# Altium PCB SPI-主板-开关.PcbDoc (part 9 of 11)
Units mm, origin at the board's own origin, x right, y up, seen from the top; angles counter-clockwise.
Board outline 97.69 x 103.45 mm, 2 copper layers (Top Layer, Bottom Layer); 86 components, 63 nets, 260 pads, 250 vias.
Unrouted connection lines stored in the file: 6.
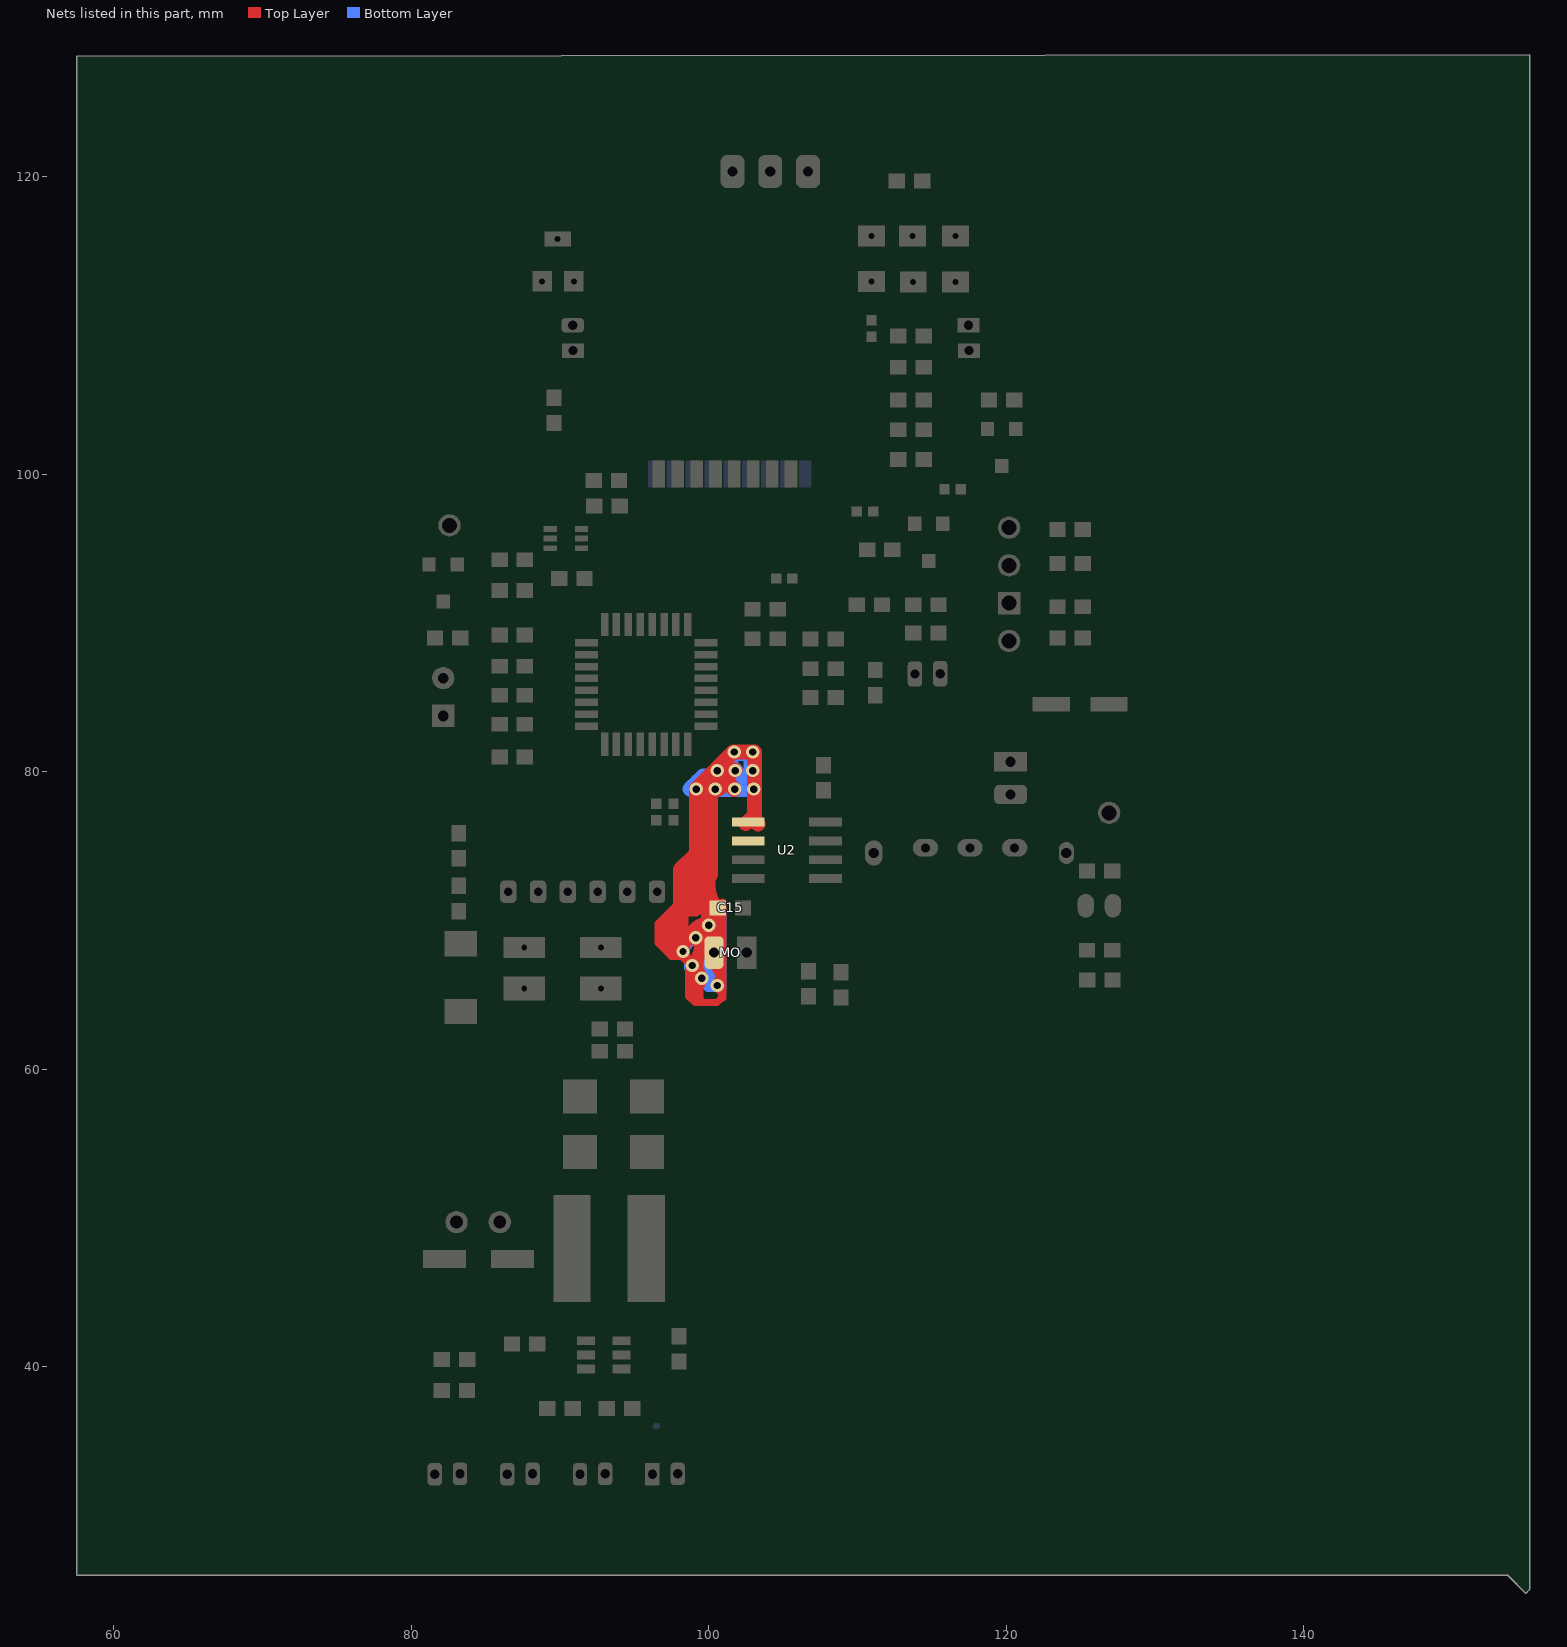
[diagram p9: the nets of this part, all layers, seen from the top]

## Via types
v1: diameter 0.9, hole 0.5, Top Layer to Bottom Layer, 104 vias
v2: diameter 0.68, hole 0.4, Top Layer to Bottom Layer, 100 vias
v3: diameter 1.1, hole 0.6, Top Layer to Bottom Layer, tented both sides, 16 vias
v4: diameter 1, hole 0.8, Top Layer to Bottom Layer, tented both sides, 8 vias
v5: diameter 1, hole 0.6, Top Layer to Bottom Layer, 4 vias
v6: diameter 0.8, hole 0.5, Top Layer to Bottom Layer, 4 vias
v7: diameter 0.7, hole 0.4, Top Layer to Bottom Layer, 4 vias
v8: diameter 0.6, hole 0.4, Top Layer to Bottom Layer, 3 vias
v9: diameter 1.1, hole 0.68, Top Layer to Bottom Layer, 2 vias
v10: diameter 0.8, hole 0.4, Top Layer to Bottom Layer, 2 vias
v11: diameter 1, hole 0.5, Top Layer to Bottom Layer, 1 vias
v12: diameter 0.9, hole 0.6, Top Layer to Bottom Layer, tented bottom, 1 vias
v13: diameter 1.2, hole 0.68, Top Layer to Bottom Layer, 1 vias

## Nets (pads, with @x,y where several pads share a name; then routed paths per layer and width w, separated by ;. In a path a pad name is that pad's centre, name@x,y a point inside that pad or via, vN(x,y) a via of type N, cw(c..) or ccw(c..) an arc to the next point about the centre after c; other vN are vias at no path point) (continued)
NetC4_1: C15.1 MO.2 U2.5 U2.6 | length 900.4
  Top Layer w0.254: 96.596,69.139 96.596,69.469 96.85,69.723 96.876,69.723 ; 97.231,70.202 97.231,69.698 ; 97.587,68.072 96.876,68.783 ; 97.762,68.336 ccw(c98.061,68.635) v1@98.181,68.229 ; 97.788,68.31 cw(c97.397,67.92) v1@97.95,67.92 ; 96.876,68.783 96.876,69.723 ; 96.876,68.783 96.774,68.885 96.596,68.885 96.596,68.809 97.447,67.958 ; 96.876,69.723 96.876,70.053 97.206,69.723 ; 96.876,69.723 97.206,69.723 ; 97.027,68.758 ccw(c98.273,70.004) v1@98.273,68.243 ; 97.027,68.758 ccw(c98.273,70.004) v1@98.273,68.243 ; 97.027,68.758 ccw(c98.273,70.004) v1@98.273,68.243 ; 97.079,69.367 96.952,69.367 97.231,69.647 ; 97.079,69.367 97.561,69.367 97.257,69.672 ; 97.079,69.367 96.977,69.266 96.977,68.809 97.828,67.958 97.447,67.958 ; 97.079,69.367 97.231,69.52 97.231,69.647 ; 97.206,69.723 97.231,69.698 ; 97.231,69.647 97.231,69.698 ; 97.231,69.647 97.257,69.672 ; 97.231,69.698 97.257,69.672 ; 97.447,67.958 cw(c97.447,67.157) v1@98.035,67.7 ; 97.447,67.958 cw(c97.447,67.157) v1@98.035,67.7 ; 97.447,67.958 cw(c97.447,67.157) v1@98.035,67.7 ; 97.461,68.325 ccw(c98.273,69.136) v1@98.273,67.989 ; 97.461,68.325 ccw(c98.273,69.136) v1@98.273,67.989 ; 97.461,68.325 ccw(c98.273,69.136) v1@98.273,67.989 ; 97.465,68.459 cw(c97.146,67.269) v1@98.213,67.885 ; 97.465,68.459 cw(c97.146,67.269) v1@98.213,67.885 ; 97.465,68.459 cw(c97.146,67.269) v1@98.213,67.885 ; 97.585,67.958 ccw(c97.585,68.607) v1@98.044,68.148 ; 97.585,67.958 ccw(c97.585,68.607) v1@98.044,68.148 ; 97.585,67.958 ccw(c97.585,68.607) v1@98.044,68.148 ; 97.587,68.172 cw(c97.445,67.64) v1@97.967,67.816 ; 97.587,68.172 cw(c97.445,67.64) v1@97.967,67.816 ; 97.587,68.172 cw(c97.445,67.64) v1@97.967,67.816 ; 97.692,68.144 ccw(c97.835,68.678) v1@98.111,68.199 ; 97.692,68.144 ccw(c97.835,68.678) v1@98.111,68.199 ; 97.692,68.144 ccw(c97.835,68.678) v1@98.111,68.199
  Top Layer w0.5: 97.184,69.295 97.561,69.672 97.565,69.676 ; 98.091,70.202 97.024,70.202 ; 98.095,70.206 98.4,70.51 ; 98.095,70.507 98.098,70.51 98.4,70.51 ; 98.095,71.272 97.024,70.202 ; v1@98.179,68.301 98.4,68.301 98.4,68.69 ; 98.437,67.405 cw(c98.246,66.985) v1@98.708,66.981 ; 98.574,67.469 ccw(c99.124,67.786) v1@98.959,67.173 ; v1@98.81,66.805 cw(c98.531,66.308) 99.101,66.308 ; v1@98.816,67.158 ccw(c98.578,67.623) 99.101,67.623 ; v1@98.825,66.709 cw(c98.339,65.778) v1@99.35,66.062 ; v1@98.856,66.787 cw(c98.654,66.032) v1@99.33,66.423 ; v1@98.881,66.782 cw(c98.782,66.048) v1@99.423,66.418 ; 98.989,66.53 cw(c98.794,66.008) v1@99.345,66.088 ; v1@99.096,66.913 ccw(c99.612,66.729) v1@99.241,66.326 ; v1@99.097,66.691 ccw(c99.806,67.101) v1@99.594,66.309 ; v1@99.105,67.009 ccw(c99.811,67.114) v1@99.495,66.474 ; v1@99.108,66.98 ccw(c99.83,66.98) v1@99.319,66.469 ; v1@99.107,66.988 ccw(c99.957,67.024) v1@99.382,66.398 ; v1@99.117,69.033 ccw(c99.032,69.935) v1@99.737,69.366 ; v1@99.119,66.64 ccw(c99.749,67.04) v1@99.586,66.311 ; v1@99.166,69.032 ccw(c99.255,69.619) 99.717,69.246 ; v1@99.192,66.662 cw(c98.795,66.264) v1@99.346,66.155 ; v1@99.247,66.722 cw(c98.898,66.373) v1@99.357,66.19 ; v1@99.309,68.935 cw(c100.368,68.323) v1@100.052,69.504 ; v1@99.32,68.912 cw(c99.591,69.027) 99.413,69.261 ; v1@99.335,68.815 cw(c100.292,68.723) v1@99.709,69.487 ; 99.375,69.232 ccw(c99.101,69.899) v1@99.805,69.741 ; 99.39,65.332 ccw(c97.26,65.332) v1@98.766,66.838 ; v1@99.41,68.961 ccw(c98.85,69.728) v1@99.8,69.703 ; 99.52,69.278 ccw(c99.964,68.834) v1@99.336,68.834 ; 99.601,69.226 cw(c99.136,69.691) v1@99.136,69.034 ; 99.807,69.026 cw(c100.377,69.026) v1@100.098,69.523 ; 99.974,71.323 99.162,70.51 ; v1@99.98,69.499 ccw(c99.929,68.995) 99.49,69.248 ccw(c99.864,68.874) v1@99.336,68.845 ; v1@100.182,69.781 cw(c100.453,69.906) 100.274,70.145 ; v1@100.187,69.769 cw(c100.622,69.934) 100.293,70.264 ; 100.202,70.151 ccw(c99.803,70.55) C15.1@100.328,70.758 ; 100.236,70.159 ccw(c99.521,70.572) 100.318,70.785 cw(c99.653,70.607) 100.25,70.262 ; C15.1@100.31,70.367 cw(c100.759,70.108) C15.1@100.625,70.609 ; C15.1@100.65,70.653 v1@99.974,69.977 ; C15.1@100.94,71.245 100.94,64.872 100.559,64.491 99.644,64.491 ; 97.024,70.202 96.596,69.774 96.596,68.504 97.485,67.615 ; 97.485,67.615 ccw(c97.485,68.281) v1@98.091,68.003 ; 97.485,67.615 ccw(c97.485,68.281) v1@98.091,68.003 ; 97.485,67.615 ccw(c97.485,68.281) v1@98.091,68.003 ; 97.485,67.615 98.171,67.615 v1@97.917,67.869 ; 97.739,67.869 ccw(c97.739,68.361) v1@98.119,68.047 ; 97.739,67.869 ccw(c97.739,68.361) v1@98.119,68.047 ; 97.739,67.869 ccw(c97.739,68.361) v1@98.119,68.047 ; 97.739,67.869 97.828,67.958 v1@97.917,67.869 ; 97.739,67.869 v1@97.917,67.869 ; v1@97.917,67.869 98.095,67.869 v1@98.146,67.818 ; v1@98.134,68.064 ccw(c97.53,68.69) 98.4,68.69 ; v1@98.134,68.064 ccw(c97.53,68.69) 98.4,68.69 ; v1@98.134,68.064 ccw(c97.53,68.69) 98.4,68.69 ; v1@98.146,67.818 97.968,67.818 v1@98.294,67.492 ; v1@98.146,67.818 98.222,67.818 98.882,67.158 v1@98.882,66.675 ; v1@98.146,67.818 98.294,67.67 v1@98.294,67.492 ; v1@98.221,67.726 cw(c98.103,67.287) 98.497,67.514 ; v1@98.221,67.726 cw(c98.103,67.287) 98.497,67.514 ; v1@98.221,67.726 cw(c98.103,67.287) 98.497,67.514 ; v1@98.221,67.726 cw(c98.103,67.287) 98.497,67.514 ; v1@98.221,67.726 cw(c98.103,67.287) 98.497,67.514 ; v1@98.221,67.726 cw(c98.103,67.287) 98.497,67.514 ; v1@98.294,67.492 v1@98.654,67.132 ; 98.393,67.393 ccw(c98.908,67.908) v1@98.908,67.18 ; 98.393,67.393 ccw(c98.908,67.908) v1@98.908,67.18 ; 98.393,67.393 ccw(c98.908,67.908) v1@98.908,67.18 ; 98.4,68.69 98.4,70.51 ; 98.4,70.51 99.162,70.51 ; v1@98.42,67.538 ccw(c99.061,67.908) v1@98.94,67.177 ; v1@98.42,67.538 ccw(c99.061,67.908) v1@98.94,67.177 ; v1@98.42,67.538 ccw(c99.061,67.908) v1@98.94,67.177 ; v1@98.458,67.581 cw(c97.857,66.98) v1@98.708,66.98 ; v1@98.458,67.581 cw(c97.857,66.98) v1@98.708,66.98 ; v1@98.458,67.581 cw(c97.857,66.98) v1@98.708,66.98 ; v1@98.465,67.864 ccw(c99.18,67.658) v1@98.654,67.132 ; v1@98.465,67.864 ccw(c99.18,67.658) v1@98.654,67.132 ; v1@98.465,67.864 ccw(c99.18,67.658) v1@98.654,67.132 ; v1@98.466,67.868 ccw(c98.959,67.736) 98.517,67.48 ; v1@98.466,67.868 ccw(c98.959,67.736) 98.517,67.48 ; v1@98.466,67.868 ccw(c98.959,67.736) 98.517,67.48 ; v1@98.466,67.868 ccw(c98.959,67.736) 98.517,67.48 ; v1@98.466,67.868 ccw(c98.959,67.736) 98.517,67.48 ; v1@98.466,67.868 ccw(c98.959,67.736) 98.517,67.48 ; v1@98.471,67.897 ccw(c99.233,67.808) v1@98.691,67.266 ; v1@98.471,67.897 ccw(c99.233,67.808) v1@98.691,67.266 ; v1@98.471,67.897 ccw(c99.233,67.808) v1@98.691,67.266 ; v1@98.471,67.897 ccw(c99.233,67.808) v1@98.691,67.266 ; v1@98.473,67.92 ccw(c99.323,67.92) v1@98.722,67.318 ; v1@98.473,67.92 ccw(c99.323,67.92) v1@98.722,67.318 ; v1@98.473,67.92 ccw(c99.323,67.92) v1@98.722,67.318 ; 98.654,65.884 cw(c100.004,65.884) v1@99.049,66.838 ; 98.654,65.884 cw(c100.004,65.884) v1@99.049,66.838 ; 98.654,65.884 cw(c100.004,65.884) v1@99.049,66.838 ; v1@98.654,66.904 v1@98.882,66.675 ; v1@98.654,66.904 98.654,64.922 99.085,64.491 99.644,64.491 ; v1@98.654,66.904 v1@98.654,67.132 ; 98.663,67.419 cw(c98.221,67.164) v1@98.714,67.032 ; 98.663,67.419 cw(c98.221,67.164) v1@98.714,67.032 ; 98.663,67.419 cw(c98.221,67.164) v1@98.714,67.032 ; 98.683,67.385 ccw(c99.077,67.612) v1@98.959,67.173 ; 98.683,67.385 ccw(c99.077,67.612) v1@98.959,67.173 ; 98.683,67.385 ccw(c99.077,67.612) v1@98.959,67.173 ; v1@98.71,66.927 ccw(c99.891,67.677) v1@99.586,66.311 ; v1@98.71,66.927 ccw(c99.891,67.677) v1@99.586,66.311 ; v1@98.71,66.927 ccw(c99.891,67.677) v1@99.586,66.311 ; v1@98.74,66.87 cw(c98.309,66.588) 98.755,66.33 ; v1@98.74,66.87 cw(c98.309,66.588) 98.755,66.33 ; v1@98.74,66.87 cw(c98.309,66.588) 98.755,66.33 ; v1@98.766,66.838 cw(c97.873,65.945) v1@99.136,65.945 ; v1@98.766,66.838 cw(c97.873,65.945) v1@99.136,65.945 ; v1@98.766,66.838 cw(c97.873,65.945) v1@99.136,65.945 ; v1@98.766,67.121 ccw(c97.26,68.628) v1@99.39,68.628 ; v1@98.766,67.121 ccw(c97.26,68.628) v1@99.39,68.628 ; v1@98.766,67.121 ccw(c97.26,68.628) v1@99.39,68.628 ; v1@98.842,66.791 cw(c98.697,66.376) 99.136,66.376 ; v1@98.842,66.791 cw(c98.697,66.376) 99.136,66.376 ; v1@98.842,66.791 cw(c98.697,66.376) 99.136,66.376 ; v1@98.868,66.784 cw(c98.66,65.739) v1@99.582,66.272 ; v1@98.868,66.784 cw(c98.66,65.739) v1@99.582,66.272 ; v1@98.868,66.784 cw(c98.66,65.739) v1@99.582,66.272 ; v1@98.868,66.784 cw(c98.66,65.739) v1@99.582,66.272 ; 98.882,65.661 cw(c99.65,65.661) v1@99.474,66.408 ; 98.882,65.661 cw(c99.65,65.661) v1@99.474,66.408 ; 98.882,65.661 cw(c99.65,65.661) v1@99.474,66.408 ; 98.882,66.436 cw(c99.452,66.436) v1@99.049,66.838 ; 98.882,66.436 cw(c99.452,66.436) v1@99.049,66.838 ; 98.882,66.436 cw(c99.452,66.436) v1@99.049,66.838 ; v1@98.882,66.675 99.136,66.421 ; v1@98.882,66.675 98.882,65.253 99.136,64.999 ; v1@98.937,66.782 cw(c99.006,66.305) v1@99.424,66.546 ; v1@98.937,66.782 cw(c99.006,66.305) v1@99.424,66.546 ; v1@98.937,66.782 cw(c99.006,66.305) v1@99.424,66.546 ; v1@98.937,66.782 cw(c99.006,66.305) v1@99.424,66.546 ; v1@98.982,66.689 ccw(c99.634,67.065) v1@99.562,66.315 ; v1@98.982,66.689 ccw(c99.634,67.065) v1@99.562,66.315 ; v1@98.982,66.689 ccw(c99.634,67.065) v1@99.562,66.315 ; v1@98.981,66.794 cw(c99.119,66.446) 99.442,66.633 ; v1@98.981,66.794 cw(c99.119,66.446) 99.442,66.633 ; v1@98.981,66.794 cw(c99.119,66.446) 99.442,66.633 ; v1@98.981,67.166 ccw(c99.119,67.513) 99.442,67.327 ; v1@98.981,67.166 ccw(c99.119,67.513) 99.442,67.327 ; v1@98.981,67.166 ccw(c99.119,67.513) 99.442,67.327 ; v1@98.995,68.693 cw(c98.04,67.738) 99.39,67.738 ; v1@98.995,68.693 cw(c98.04,67.738) 99.39,67.738 ; v1@98.995,68.693 cw(c98.04,67.738) 99.39,67.738 ; v1@99.02,68.671 cw(c98.691,68.209) 99.239,68.062 ; v1@99.02,68.671 cw(c98.691,68.209) 99.239,68.062 ; v1@99.02,68.671 cw(c98.691,68.209) 99.239,68.062 ; v1@99.02,68.671 cw(c98.691,68.209) 99.239,68.062 ; v1@99.02,68.671 cw(c98.691,68.209) 99.239,68.062 ; v1@99.02,68.671 cw(c98.691,68.209) 99.239,68.062 ; 99.028,66.529 ccw(c99.543,67.044) v1@99.543,66.316 ; 99.028,66.529 ccw(c99.543,67.044) v1@99.543,66.316 ; 99.028,66.529 ccw(c99.543,67.044) v1@99.543,66.316 ; v1@99.036,69.007 ccw(c98.427,70.062) v1@99.604,69.747 ; v1@99.036,69.007 ccw(c98.427,70.062) v1@99.604,69.747 ; v1@99.036,69.007 ccw(c98.427,70.062) v1@99.604,69.747 ; v1@99.036,69.007 ccw(c98.427,70.062) v1@99.604,69.747 ; v1@99.036,69.007 ccw(c98.427,70.062) v1@99.604,69.747 ; v1@99.036,69.007 ccw(c98.427,70.062) v1@99.604,69.747 ; 99.037,66.369 cw(c99.423,66.591) v1@99.067,66.859 ; 99.037,66.369 cw(c99.423,66.591) v1@99.067,66.859 ; 99.037,66.369 cw(c99.423,66.591) v1@99.067,66.859 ; 99.046,66.283 ccw(c99.699,66.458) v1@99.418,65.843 ; 99.046,66.283 ccw(c99.699,66.458) v1@99.418,65.843 ; 99.046,66.283 ccw(c99.699,66.458) v1@99.418,65.843 ; 99.058,65.636 ccw(c98.802,66.112) v1@99.343,66.115 ; 99.058,65.636 ccw(c98.802,66.112) v1@99.343,66.115 ; 99.058,65.636 ccw(c98.802,66.112) v1@99.343,66.115 ; 99.079,66.521 ccw(c99.446,66.733) v1@99.512,66.314 ; 99.079,66.521 ccw(c99.446,66.733) v1@99.512,66.314 ; 99.079,66.521 ccw(c99.446,66.733) v1@99.512,66.314 ; v1@99.079,66.877 ccw(c99.401,66.686) 99.136,66.421 ; v1@99.079,66.877 ccw(c99.401,66.686) 99.136,66.421 ; v1@99.079,66.877 ccw(c99.401,66.686) 99.136,66.421 ; v1@99.095,69.03 ccw(c99.019,69.393) 99.39,69.393 ; v1@99.095,69.03 ccw(c99.019,69.393) 99.39,69.393 ; v1@99.095,69.03 ccw(c99.019,69.393) 99.39,69.393 ; v1@99.101,67.032 cw(c100.204,67.327) 99.215,67.898 ; v1@99.101,67.032 cw(c100.204,67.327) 99.215,67.898 ; v1@99.101,67.032 cw(c100.204,67.327) 99.215,67.898 ; v1@99.102,66.932 ccw(c99.604,66.808) v1@99.254,66.427 ; v1@99.102,66.932 ccw(c99.604,66.808) v1@99.254,66.427 ; v1@99.102,66.932 ccw(c99.604,66.808) v1@99.254,66.427 ; v1@99.102,66.932 ccw(c99.604,66.808) v1@99.254,66.427 ; v1@99.103,66.938 ccw(c99.662,66.817) v1@99.258,66.413 ; v1@99.103,66.938 ccw(c99.662,66.817) v1@99.258,66.413 ; v1@99.103,66.938 ccw(c99.662,66.817) v1@99.258,66.413 ; v1@99.103,66.938 ccw(c99.662,66.817) v1@99.258,66.413 ; v1@99.115,69.033 ccw(c98.95,70.572) v1@100.266,69.757 ; v1@99.115,69.033 ccw(c98.95,70.572) v1@100.266,69.757 ; v1@99.115,69.033 ccw(c98.95,70.572) v1@100.266,69.757 ; v1@99.115,69.033 ccw(c98.95,70.572) v1@100.266,69.757 ; v1@99.115,69.033 ccw(c98.95,70.572) v1@100.266,69.757 ; v1@99.115,69.033 ccw(c98.95,70.572) v1@100.266,69.757 ; v1@99.12,66.768 ccw(c98.467,67.421) 99.39,67.421 ; v1@99.12,66.768 ccw(c98.467,67.421) 99.39,67.421 ; v1@99.12,66.768 ccw(c98.467,67.421) 99.39,67.421 ; v1@99.12,67.192 cw(c98.467,66.539) 99.39,66.539 ; v1@99.12,67.192 cw(c98.467,66.539) 99.39,66.539 ; v1@99.12,67.192 cw(c98.467,66.539) 99.39,66.539 ; 99.136,64.927 cw(c100.405,64.927) v1@99.66,65.954 ; 99.136,64.927 cw(c100.405,64.927) v1@99.66,65.954 ; 99.136,64.927 cw(c100.405,64.927) v1@99.66,65.954 ; 99.136,64.999 99.39,64.745 ; 99.136,64.999 99.136,66.421 ; 99.136,66.421 ccw(c99.42,66.705) v1@99.502,66.312 ; 99.136,66.421 ccw(c99.42,66.705) v1@99.502,66.312 ; 99.136,66.421 ccw(c99.42,66.705) v1@99.502,66.312 ; v1@99.136,69.034 ccw(c99.136,69.473) 99.447,69.163 ; v1@99.136,69.034 ccw(c99.136,69.473) 99.447,69.163 ; v1@99.136,69.034 ccw(c99.136,69.473) 99.447,69.163 ; v1@99.136,69.034 ccw(c99.136,69.473) 99.447,69.163 ; 99.162,70.51 cw(c99.873,69.799) C15.1@100.423,70.641 ; 99.162,70.51 cw(c99.873,69.799) C15.1@100.423,70.641 ; 99.162,70.51 cw(c99.873,69.799) C15.1@100.423,70.641 ; v1@99.168,68.536 ccw(c99.088,69.284) 99.727,68.888 ; v1@99.168,68.536 ccw(c99.088,69.284) 99.727,68.888 ; v1@99.168,68.536 ccw(c99.088,69.284) 99.727,68.888 ; v1@99.168,68.536 ccw(c99.088,69.284) 99.727,68.888 ; v1@99.168,68.536 ccw(c99.088,69.284) 99.727,68.888 ; v1@99.168,68.536 ccw(c99.088,69.284) 99.727,68.888 ; v1@99.182,69.017 cw(c100.015,68.536) v1@100.002,69.498 ; v1@99.182,69.017 cw(c100.015,68.536) v1@100.002,69.498 ; v1@99.182,69.017 cw(c100.015,68.536) v1@100.002,69.498 ; v1@99.182,69.017 cw(c100.015,68.536) v1@100.002,69.498 ; 99.272,65.476 ccw(c98.834,65.831) v1@99.357,66.042 ; 99.272,65.476 ccw(c98.834,65.831) v1@99.357,66.042 ; 99.272,65.476 ccw(c98.834,65.831) v1@99.357,66.042 ; 99.288,68.184 cw(c99.735,68.442) v1@99.304,68.724 ; 99.288,68.184 cw(c99.735,68.442) v1@99.304,68.724 ; 99.288,68.184 cw(c99.735,68.442) v1@99.304,68.724 ; v1@99.301,69.017 cw(c100.15,68.527) v1@100.025,69.499 ; v1@99.301,69.017 cw(c100.15,68.527) v1@100.025,69.499 ; v1@99.301,69.017 cw(c100.15,68.527) v1@100.025,69.499 ; v1@99.315,68.924 cw(c99.677,69.106) 99.39,69.393 ; v1@99.315,68.924 cw(c99.677,69.106) 99.39,69.393 ; v1@99.315,68.924 cw(c99.677,69.106) 99.39,69.393 ; v1@99.319,68.753 cw(c100.364,68.291) v1@99.952,69.356 ; v1@99.319,68.753 cw(c100.364,68.291) v1@99.952,69.356 ; v1@99.319,68.753 cw(c100.364,68.291) v1@99.952,69.356 ; v1@99.319,68.753 cw(c100.364,68.291) v1@99.952,69.356 ; v1@99.329,68.885 cw(c99.898,69.037) 99.482,69.453 ; v1@99.329,68.885 cw(c99.898,69.037) 99.482,69.453 ; v1@99.329,68.885 cw(c99.898,69.037) 99.482,69.453 ; v1@99.329,68.885 cw(c99.898,69.037) 99.482,69.453 ; v1@99.336,68.834 cw(c100.555,68.834) v1@99.693,69.696 ; v1@99.336,68.834 cw(c100.555,68.834) v1@99.693,69.696 ; v1@99.336,68.834 cw(c100.075,68.834) 99.553,69.356 ; v1@99.336,68.834 cw(c99.862,68.834) 99.49,69.206 ; v1@99.336,68.834 cw(c100.555,68.834) v1@99.693,69.696 ; v1@99.336,68.834 cw(c100.075,68.834) 99.553,69.356 ; v1@99.336,68.834 cw(c99.862,68.834) 99.49,69.206 ; v1@99.336,68.834 cw(c100.075,68.834) 99.553,69.356 ; v1@99.336,68.834 cw(c99.862,68.834) 99.49,69.206 ; v1@99.336,68.834 cw(c100.075,68.834) 99.553,69.356 ; v1@99.336,68.834 cw(c99.862,68.834) 99.49,69.206 ; v1@99.336,68.846 cw(c100.016,68.887) 99.534,69.369 ; v1@99.336,68.846 cw(c100.016,68.887) 99.534,69.369 ; v1@99.336,68.846 cw(c100.016,68.887) 99.534,69.369 ; v1@99.336,68.846 cw(c100.016,68.887) 99.534,69.369 ; v1@99.336,68.846 cw(c100.016,68.887) 99.534,69.369 ; v1@99.353,69.157 cw(c99.946,68.814) v1@99.988,69.498 ; v1@99.353,69.157 cw(c99.946,68.814) v1@99.988,69.498 ; v1@99.353,69.157 cw(c99.946,68.814) v1@99.988,69.498 ; 99.358,66.661 ccw(c99.949,66.819) v1@99.643,66.289 ; 99.358,66.661 ccw(c99.949,66.819) v1@99.643,66.289 ; 99.358,66.661 ccw(c99.949,66.819) v1@99.643,66.289 ; 99.39,64.745 99.644,64.491 ; 99.39,64.745 99.39,69.393 ; 99.39,65.265 cw(c100.393,65.265) v1@99.684,65.975 ; 99.39,65.265 cw(c100.393,65.265) v1@99.684,65.975 ; 99.39,65.265 cw(c100.393,65.265) v1@99.684,65.975 ; 99.39,66.967 ccw(c100.393,66.967) v1@99.684,66.258 ; 99.39,66.967 ccw(c100.393,66.967) v1@99.684,66.258 ; 99.39,66.967 ccw(c100.393,66.967) v1@99.684,66.258 ; 99.39,67.743 cw(c101.954,67.743) v1@100.141,69.556 ; 99.39,67.743 cw(c101.954,67.743) v1@100.141,69.556 ; 99.39,67.743 cw(c101.954,67.743) v1@100.141,69.556 ; v1@99.39,68.95 cw(c100.747,68.95) v1@99.788,69.91 ; v1@99.39,68.95 cw(c100.747,68.95) v1@99.788,69.91 ; v1@99.39,68.95 cw(c100.747,68.95) v1@99.788,69.91 ; 99.39,69.393 cw(c99.751,69.032) v1@99.93,69.51 ; 99.39,69.393 cw(c99.751,69.032) v1@99.93,69.51 ; 99.39,69.393 cw(c99.751,69.032) v1@99.93,69.51 ; 99.39,69.393 v1@99.974,69.977 ; v1@99.417,65.961 cw(c99.251,65.754) 99.48,65.622 ; v1@99.417,65.961 cw(c99.251,65.754) 99.48,65.622 ; v1@99.417,65.961 cw(c99.251,65.754) 99.48,65.622 ; v1@99.417,66.272 ccw(c99.251,66.478) 99.48,66.611 ; v1@99.417,66.272 ccw(c99.251,66.478) 99.48,66.611 ; v1@99.417,66.272 ccw(c99.251,66.478) 99.48,66.611 ; 99.597,70.946 cw(c100.217,70.325) C15.1@100.697,71.059 ; 99.597,70.946 cw(c100.217,70.325) C15.1@100.697,71.059 ; 99.597,70.946 cw(c100.217,70.325) C15.1@100.697,71.059 ; 99.676,69.202 ccw(c99.362,69.536) v1@99.806,69.648 ; 99.676,69.202 ccw(c99.362,69.536) v1@99.806,69.648 ; 99.676,69.202 ccw(c99.362,69.536) v1@99.806,69.648 ; 99.676,69.202 ccw(c99.362,69.536) v1@99.806,69.648 ; 99.692,68.779 ccw(c98.703,69.35) v1@99.807,69.646 ; 99.692,68.779 ccw(c98.703,69.35) v1@99.807,69.646 ; 99.692,68.779 ccw(c98.703,69.35) v1@99.807,69.646 ; v1@99.9,69.871 ccw(c99.363,70.8) C15.1@100.4,70.523 ; v1@99.9,69.871 ccw(c99.363,70.8) C15.1@100.4,70.523 ; v1@99.9,69.871 ccw(c99.363,70.8) C15.1@100.4,70.523 ; v1@99.9,69.871 ccw(c99.363,70.8) C15.1@100.4,70.523 ; v1@99.925,69.883 ccw(c99.652,70.563) C15.1@100.36,70.374 ; v1@99.925,69.883 ccw(c99.652,70.563) C15.1@100.36,70.374 ; v1@99.925,69.883 ccw(c99.652,70.563) C15.1@100.36,70.374 ; v1@99.925,69.883 ccw(c99.652,70.563) C15.1@100.36,70.374 ; v1@99.948,69.891 ccw(c99.829,70.336) 100.228,70.106 ; v1@99.948,69.891 ccw(c99.829,70.336) 100.228,70.106 ; v1@99.948,69.891 ccw(c99.829,70.336) 100.228,70.106 ; v1@99.948,69.891 ccw(c99.829,70.336) 100.228,70.106 ; v1@99.948,69.891 ccw(c99.829,70.336) 100.228,70.106 ; v1@99.974,69.977 ccw(c99.161,70.79) C15.1@100.31,70.839 ; v1@99.974,69.977 ccw(c99.161,70.79) C15.1@100.31,70.839 ; v1@99.974,69.977 ccw(c99.161,70.79) C15.1@100.31,70.839 ; v1@100.07,69.832 cw(c101.345,69.491) C15.1@100.685,70.634 ; v1@100.07,69.832 cw(c101.345,69.491) C15.1@100.685,70.634 ; v1@100.07,69.832 cw(c101.345,69.491) C15.1@100.685,70.634 ; v1@100.07,69.832 cw(c101.345,69.491) C15.1@100.685,70.634 ; MO.2@100.175,67.108 cw(c98.33,65.262) 100.94,65.262 ; MO.2@100.175,67.108 cw(c98.33,65.262) 100.94,65.262 ; MO.2@100.175,67.108 cw(c98.33,65.262) 100.94,65.262 ; MO.2@100.175,68.573 ccw(c98.33,70.419) C15.1@100.94,70.419 ; MO.2@100.175,68.573 ccw(c98.33,70.419) C15.1@100.94,70.419 ; MO.2@100.175,68.573 ccw(c98.33,70.419) C15.1@100.94,70.419 ; v1@100.184,69.775 cw(c100.849,70.052) C15.1@100.225,70.412 ; v1@100.184,69.775 cw(c100.849,70.052) C15.1@100.225,70.412 ; v1@100.184,69.775 cw(c100.849,70.052) C15.1@100.225,70.412 ; v1@100.184,69.775 cw(c100.849,70.052) C15.1@100.225,70.412 ; v1@100.184,69.775 cw(c100.849,70.052) C15.1@100.225,70.412 ; v1@100.184,69.775 cw(c100.849,70.052) C15.1@100.225,70.412 ; v1@100.193,69.749 cw(c100.681,69.88) 100.243,70.132 ; v1@100.193,69.749 cw(c100.681,69.88) 100.243,70.132 ; v1@100.193,69.749 cw(c100.681,69.88) 100.243,70.132 ; v1@100.193,69.749 cw(c100.681,69.88) 100.243,70.132 ; v1@100.193,69.749 cw(c100.681,69.88) 100.243,70.132 ; v1@100.2,69.698 cw(c101.418,69.698) C15.1@100.557,70.559 ; v1@100.2,69.698 cw(c101.418,69.698) C15.1@100.557,70.559 ; v1@100.2,69.698 cw(c101.418,69.698) C15.1@100.557,70.559 ; 100.283,70.084 ccw(c99.62,70.467) C15.1@100.328,70.756 ; 100.283,70.084 ccw(c99.62,70.467) C15.1@100.328,70.756 ; 100.283,70.084 ccw(c99.62,70.467) C15.1@100.328,70.756 ; v1@100.443,65.775 ccw(c99.243,66.975) MO.2@100.94,66.975 ; v1@100.443,65.775 ccw(c99.243,66.975) MO.2@100.94,66.975 ; v1@100.443,65.775 ccw(c99.243,66.975) MO.2@100.94,66.975 ; C15.1@100.473,70.641 cw(c100.072,70.024) 100.783,69.833 ; C15.1@100.473,70.641 cw(c100.072,70.024) 100.783,69.833 ; C15.1@100.473,70.641 cw(c100.072,70.024) 100.783,69.833 ; C15.1@100.483,70.673 cw(c99.381,69.571) 100.94,69.571 ; C15.1@100.483,70.673 cw(c99.381,69.571) 100.94,69.571 ; C15.1@100.483,70.673 cw(c99.381,69.571) 100.94,69.571 ; v1@100.506,65.45 cw(c100.226,64.793) 100.94,64.793 ; v1@100.506,65.45 cw(c100.226,64.793) 100.94,64.793 ; v1@100.506,65.45 cw(c100.226,64.793) 100.94,64.793 ; v1@100.522,65.824 ccw(c100.438,66.083) 100.701,66.153 ; v1@100.522,65.824 ccw(c100.438,66.083) 100.701,66.153 ; v1@100.522,65.824 ccw(c100.438,66.083) 100.701,66.153 ; v1@100.522,65.824 ccw(c100.438,66.083) 100.701,66.153 ; v1@100.522,65.824 ccw(c100.438,66.083) 100.701,66.153 ; v1@100.522,65.824 ccw(c100.438,66.083) 100.701,66.153 ; MO.2@100.529,67.461 cw(c99.537,66.469) 100.94,66.469 ; MO.2@100.529,67.461 cw(c99.537,66.469) 100.94,66.469 ; MO.2@100.529,67.461 cw(c99.537,66.469) 100.94,66.469 ; MO.2@100.529,68.22 ccw(c99.537,69.212) 100.94,69.212 ; MO.2@100.529,68.22 ccw(c99.537,69.212) 100.94,69.212 ; MO.2@100.529,68.22 ccw(c99.537,69.212) 100.94,69.212 ; 100.739,66.131 cw(c101.568,66.609) MO.2@100.785,67.16 ; 100.739,66.131 cw(c101.568,66.609) MO.2@100.785,67.16 ; 100.739,66.131 cw(c101.568,66.609) MO.2@100.785,67.16 ; 100.739,69.55 ccw(c101.568,69.071) MO.2@100.785,68.521 ; 100.739,69.55 ccw(c101.568,69.071) MO.2@100.785,68.521 ; 100.739,69.55 ccw(c101.568,69.071) MO.2@100.785,68.521 ; v1@100.77,65.706 cw(c101.561,66.015) 100.826,66.439 ; v1@100.77,65.706 cw(c101.561,66.015) 100.826,66.439 ; v1@100.77,65.706 cw(c101.561,66.015) 100.826,66.439 ; 100.817,70.095 cw(c101.285,70.366) C15.1@100.858,70.697 ; 100.817,70.095 cw(c101.285,70.366) C15.1@100.858,70.697 ; 100.817,70.095 cw(c101.285,70.366) C15.1@100.858,70.697 ; 98.882,65.029 cw(c99.799,65.029) 99.589,65.922 ccw(c99.799,65.029) 98.882,65.029 ; v1@99.101,66.928 ccw(c100.204,66.632) 99.215,66.061 cw(c100.204,66.632) v1@99.101,66.928 ; 99.136,65.908 cw(c99.694,65.908) 99.366,66.359 ccw(c99.694,65.908) 99.136,65.908 ; v1@100.761,65.54 ccw(c101.004,65.41) 100.834,65.192 cw(c101.004,65.41) v1@100.761,65.54
  Top Layer w1: 97.561,69.672 97.561,68.918 98.095,68.385 ; 97.565,69.676 98.091,70.202 ; 98.098,70.51 98.505,70.917 98.628,70.917 98.984,71.272 98.984,73.863 99.162,74.041 99.974,73.228 ; v1@98.179,68.301 98.095,68.385 ; 99.974,71.323 v1@99.974,69.977 ; 99.974,71.425 99.974,73.228 ; 99.974,75.082 99.974,73.228 ; 100.127,79.223 100.127,73.076 99.974,73.228 ; MO.2@100.533,67.691 99.974,68.25 v1@99.974,69.977 ; U2.5@102.489,76.505 102.768,76.784 103.073,76.784 v1@103.073,81.331 ; v1@102.921,81.331 v1@103.073,81.331 ; 98.095,68.385 98.095,70.206 98.095,70.507 98.095,71.272 98.095,73.431 99.162,74.498 v1(99.162,78.842) ; 98.095,68.385 98.4,68.69 ; 98.211,68.501 cw(c99.136,67.575) v1@99.136,68.884 ; 98.211,68.501 cw(c99.136,67.575) v1@99.136,68.884 ; 98.211,68.501 cw(c99.136,67.575) v1@99.136,68.884 ; v1@98.223,67.92 cw(c99.654,67.92) 98.642,68.932 ; v1@98.223,67.92 cw(c99.654,67.92) 98.642,68.932 ; v1@98.223,67.92 cw(c99.654,67.92) 98.642,68.932 ; v1@98.226,67.902 cw(c98.929,68.16) 98.4,68.69 ; v1@98.226,67.902 cw(c98.929,68.16) 98.4,68.69 ; v1@98.226,67.902 cw(c98.929,68.16) 98.4,68.69 ; v1@98.226,67.902 cw(c98.929,68.16) 98.4,68.69 ; v1@98.226,67.902 cw(c98.929,68.16) 98.4,68.69 ; v1@98.226,67.902 cw(c98.929,68.16) 98.4,68.69 ; 98.4,68.69 cw(c98.937,68.152) v1@99.15,68.882 ; 98.4,68.69 cw(c98.937,68.152) v1@99.15,68.882 ; 98.4,68.69 cw(c98.937,68.152) v1@99.15,68.882 ; 98.4,68.69 cw(c98.937,68.152) v1@99.15,68.882 ; 98.4,68.69 cw(c98.937,68.152) v1@99.15,68.882 ; 98.4,68.69 cw(c98.937,68.152) v1@99.15,68.882 ; 98.4,68.69 99.103,69.393 ; 99.074,69.364 cw(c100,68.439) v1@100,69.748 ; 99.074,69.364 cw(c100,68.439) v1@100,69.748 ; 99.074,69.364 cw(c100,68.439) v1@100,69.748 ; 99.103,69.393 cw(c99.961,68.535) v1@100.001,69.748 ; 99.103,69.393 cw(c99.961,68.535) v1@100.001,69.748 ; 99.103,69.393 cw(c99.961,68.535) v1@100.001,69.748 ; v1@99.149,68.882 cw(c98.868,67.812) MO.2@99.974,67.812 ; v1@99.149,68.882 cw(c98.868,67.812) MO.2@99.974,67.812 ; v1@99.149,68.882 cw(c98.868,67.812) MO.2@99.974,67.812 ; v1@99.154,68.787 ccw(c98.702,69.977) v1@99.974,69.977 ; v1@99.154,68.787 ccw(c98.702,69.977) v1@99.974,69.977 ; v1@99.154,68.787 ccw(c98.702,69.977) v1@99.974,69.977 ; v1(99.162,78.842) cw(c99.833,78.17) v1@100.465,78.879 ; v1(99.162,78.842) cw(c99.833,78.17) v1@100.465,78.879 ; v1(99.162,78.842) cw(c99.833,78.17) v1@100.465,78.879 ; v1(99.162,78.842) 101.016,80.696 ; v1@99.974,69.436 cw(c101.974,69.436) C15.1@100.56,70.85 ; v1@99.974,69.436 cw(c101.974,69.436) C15.1@100.56,70.85 ; v1@99.974,69.436 cw(c101.974,69.436) C15.1@100.56,70.85 ; v1@99.974,69.799 cw(c101.211,69.799) C15.1@100.56,70.85 ; v1@99.974,69.799 cw(c101.211,69.799) C15.1@100.56,70.85 ; v1@99.974,69.799 cw(c101.211,69.799) C15.1@100.56,70.85 ; v1@99.974,69.799 cw(c101.211,69.799) C15.1@100.56,70.85 ; v1@99.974,69.799 cw(c101.211,69.799) C15.1@100.56,70.85 ; v1@99.974,69.799 cw(c101.211,69.799) C15.1@100.56,70.85 ; v1@99.974,69.82 ccw(c101.988,69.82) MO.2@100.564,68.396 ; v1@99.974,69.82 ccw(c101.988,69.82) MO.2@100.564,68.396 ; v1@99.974,69.82 ccw(c101.988,69.82) MO.2@100.564,68.396 ; 99.974,72.264 ccw(c101.974,72.264) C15.1@100.56,70.85 ; 99.974,72.264 ccw(c101.974,72.264) C15.1@100.56,70.85 ; 99.974,72.264 ccw(c101.974,72.264) C15.1@100.56,70.85 ; 100.127,78.226 cw(c101.047,78.226) v1@100.396,78.877 ; 100.127,78.226 cw(c101.047,78.226) v1@100.396,78.877 ; 100.127,78.226 cw(c101.047,78.226) v1@100.396,78.877 ; 100.227,68.979 cw(c99.485,68.551) MO.2@100.313,68.329 ; 100.227,68.979 cw(c99.485,68.551) MO.2@100.313,68.329 ; 100.227,68.979 cw(c99.485,68.551) MO.2@100.313,68.329 ; v1@100.382,78.835 cw(c102.59,79.121) 101.016,80.696 ; v1@100.382,78.835 cw(c102.59,79.121) 101.016,80.696 ; v1@100.382,78.835 cw(c102.59,79.121) 101.016,80.696 ; v1@100.434,78.792 ccw(c100.406,79.4) 101.016,79.4 ; v1@100.434,78.792 ccw(c100.406,79.4) 101.016,79.4 ; v1@100.434,78.792 ccw(c100.406,79.4) 101.016,79.4 ; v1@100.467,78.806 ccw(c99.142,80.131) v1@101.016,80.131 ; v1@100.467,78.806 ccw(c99.142,80.131) v1@101.016,80.131 ; v1@100.467,78.806 ccw(c99.142,80.131) v1@101.016,80.131 ; v1@100.584,80.136 cw(c100.581,79.443) 101.251,79.623 ; v1@100.584,80.136 cw(c100.581,79.443) 101.251,79.623 ; v1@100.584,80.136 cw(c100.581,79.443) 101.251,79.623 ; v1@100.606,80.041 ccw(c100.288,80.696) 101.016,80.696 ; v1@100.606,80.041 ccw(c100.288,80.696) 101.016,80.696 ; v1@100.606,80.041 ccw(c100.288,80.696) 101.016,80.696 ; v1@100.609,80.13 cw(c99.775,78.685) 101.386,79.117 ; v1@100.609,80.13 cw(c99.775,78.685) 101.386,79.117 ; v1@100.609,80.13 cw(c99.775,78.685) 101.386,79.117 ; v1@100.616,80.125 cw(c99.915,79.276) 101.016,79.276 ; v1@100.616,80.125 cw(c99.915,79.276) 101.016,79.276 ; v1@100.616,80.125 cw(c99.915,79.276) 101.016,79.276 ; 101.016,79.061 cw(c102.16,79.061) v1@101.76,80.133 ; 101.016,79.061 cw(c102.16,79.061) v1@101.76,80.133 ; 101.016,79.061 cw(c102.16,79.061) v1@101.76,80.133 ; 101.016,79.4 101.016,80.696 ; 101.016,80.499 ccw(c103.41,80.499) v1@101.717,78.806 ; 101.016,80.499 ccw(c103.41,80.499) v1@101.717,78.806 ; 101.016,80.499 ccw(c103.41,80.499) v1@101.717,78.806 ; 101.016,80.696 101.651,81.331 v1@103.073,81.331 ; 103.073,77.064 ccw(c103.891,77.064) U2.5@103.313,76.486 ; 103.073,77.064 ccw(c103.891,77.064) U2.5@103.313,76.486 ; 103.073,77.064 ccw(c103.891,77.064) U2.5@103.313,76.486
  Bottom Layer w0.5: v1@98.218,68.112 ccw(c97.996,68.889) 98.747,68.591 ; v1@98.472,67.902 cw(c99.474,67.816) v1@98.826,68.585 ; v1@98.474,68.223 cw(c99.318,67.595) v1@99.165,68.636 ; 98.602,67.447 ccw(c99.112,67.741) v1@98.959,67.173 ; 98.614,68.281 cw(c99.322,67.786) v1@99.171,68.637 ; v1@99.146,66.653 ccw(c99.785,67.022) 99.594,66.309 cw(c99.777,66.99) v1@99.167,66.637 ; v1@99.226,69.013 ccw(c99.433,69.426) 99.726,69.069 ; v1@99.308,66.496 cw(c99.791,66.98) 99.108,66.98 ccw(c99.803,66.98) v1@99.311,66.488 ; v1@99.335,68.811 cw(c100.318,68.699) v1@99.702,69.473 ; v1@99.361,69.131 cw(c100.135,68.516) v1@100.023,69.499 ; 99.383,69.219 ccw(c99.094,69.884) v1@99.804,69.738 ; 99.666,69.357 ccw(c100.167,68.681) v1@99.334,68.805 ; 99.751,66.838 ccw(c99.409,67.389) MO.2@100.058,67.39 ; 99.849,69.153 ccw(c100.682,69.634) MO.2@100.524,68.685 ; MO.2@99.887,66.922 cw(c100.223,66.382) MO.2@100.367,67.001 ; v1@99.902,69.523 cw(c99.623,69.026) 100.193,69.026 ; 99.924,66.492 ccw(c100.523,66.142) 100.051,65.634 ; MO.2@100.008,68.877 cw(c99.458,68.559) MO.2@100.072,68.394 ; MO.2@100.112,68.49 ccw(c99.332,68.94) 100.201,69.173 ; 100.177,69.263 ccw(c101.174,69.53) MO.2@100.658,68.637 ; 100.263,69.115 cw(c100.869,69.465) v1@100.193,69.646 ; 100.889,70.129 100.736,70.129 ; v1@98.318,68.295 cw(c99.136,67.477) v1@99.136,68.634 ; v1@98.318,68.295 cw(c99.136,67.477) v1@99.136,68.634 ; v1@98.318,68.295 cw(c99.136,67.477) v1@99.136,68.634 ; v1@98.407,67.567 ccw(c99.114,67.975) v1@98.948,67.176 ; v1@98.407,67.567 ccw(c99.114,67.975) v1@98.948,67.176 ; v1@98.407,67.567 ccw(c99.114,67.975) v1@98.948,67.176 ; v1@98.445,68.128 cw(c99.355,67.603) v1@99.171,68.637 ; v1@98.445,68.128 cw(c99.355,67.603) v1@99.171,68.637 ; v1@98.445,68.128 cw(c99.355,67.603) v1@99.171,68.637 ; v1@98.445,68.128 cw(c99.355,67.603) v1@99.171,68.637 ; v1@98.445,68.128 cw(c99.355,67.603) v1@99.171,68.637 ; v1@98.445,68.128 cw(c99.355,67.603) v1@99.171,68.637 ; v1@98.461,67.853 ccw(c99.028,67.652) v1@98.603,67.227 ; v1@98.461,67.853 ccw(c99.028,67.652) v1@98.603,67.227 ; v1@98.461,67.853 ccw(c99.028,67.652) v1@98.603,67.227 ; 98.469,67.362 ccw(c98.908,67.801) v1@98.908,67.18 ; 98.469,67.362 ccw(c98.908,67.801) v1@98.908,67.18 ; 98.469,67.362 ccw(c98.908,67.801) v1@98.908,67.18 ; v1@98.471,67.896 cw(c99.512,67.775) v1@98.988,68.682 ; v1@98.471,67.896 cw(c99.512,67.775) v1@98.988,68.682 ; v1@98.471,67.896 cw(c99.512,67.775) v1@98.988,68.682 ; v1@98.472,67.904 ccw(c99.276,67.839) v1@98.706,67.268 ; v1@98.472,67.904 ccw(c99.276,67.839) v1@98.706,67.268 ; v1@98.472,67.904 ccw(c99.276,67.839) v1@98.706,67.268 ; v1@98.472,67.904 ccw(c99.276,67.839) v1@98.706,67.268 ; v1@98.473,67.92 cw(c99.753,67.92) v1@98.848,68.825 ; v1@98.473,67.92 cw(c99.042,67.92) 98.639,68.322 ; v1@98.473,67.92 cw(c99.753,67.92) v1@98.848,68.825 ; v1@98.473,67.92 cw(c99.042,67.92) 98.639,68.322 ; v1@98.473,67.92 cw(c99.042,67.92) 98.639,68.322 ; v1@98.473,67.92 cw(c99.042,67.92) 98.639,68.322 ; v1@98.473,67.92 cw(c99.753,67.92) v1@98.848,68.825 ; 98.533,68.338 ccw(c98.226,68.995) v1@98.939,68.869 ; 98.533,68.338 ccw(c98.226,68.995) v1@98.939,68.869 ; 98.533,68.338 ccw(c98.226,68.995) v1@98.939,68.869 ; 98.533,68.338 ccw(c98.226,68.995) v1@98.939,68.869 ; v1@98.603,67.227 98.603,66.777 v1@99.441,65.938 ; v1@98.603,67.227 97.968,67.862 97.968,67.945 100.66,70.637 100.94,70.637 100.94,65.43 100.051,65.43 ; v1@98.652,66.823 ccw(c99.054,67.069) 99.19,66.618 ; v1@98.652,66.823 ccw(c99.054,67.069) 99.19,66.618 ; v1@98.652,66.823 ccw(c99.054,67.069) 99.19,66.618 ; v1@98.652,66.823 ccw(c99.054,67.069) 99.19,66.618 ; v1@98.652,66.823 ccw(c99.054,67.069) 99.19,66.618 ; v1@98.652,66.823 ccw(c99.054,67.069) 99.19,66.618 ; v1@98.724,66.655 ccw(c99.543,67.474) v1@99.543,66.316 ; v1@98.724,66.655 ccw(c99.543,67.474) v1@99.543,66.316 ; v1@98.724,66.655 ccw(c99.543,67.474) v1@99.543,66.316 ; 98.792,68.486 ccw(c98.444,68.834) v1@98.936,68.834 ; 98.792,68.486 ccw(c98.444,68.834) v1@98.936,68.834 ; 98.792,68.486 ccw(c98.444,68.834) v1@98.936,68.834 ; 98.792,68.486 ccw(c98.444,68.834) v1@98.936,68.834 ; 98.801,68.495 cw(c99.136,68.16) v1@99.136,68.634 ; 98.801,68.495 cw(c99.136,68.16) v1@99.136,68.634 ; 98.801,68.495 cw(c99.136,68.16) v1@99.136,68.634 ; 98.801,68.495 cw(c99.136,68.16) v1@99.136,68.634 ; v1@98.973,66.726 ccw(c99.706,67.149) v1@99.574,66.314 ; v1@98.973,66.726 ccw(c99.706,67.149) v1@99.574,66.314 ; v1@98.973,66.726 ccw(c99.706,67.149) v1@99.574,66.314 ; v1@98.998,66.711 ccw(c99.705,67.119) v1@99.575,66.314 ; v1@98.998,66.711 ccw(c99.705,67.119) v1@99.575,66.314 ; v1@98.998,66.711 ccw(c99.705,67.119) v1@99.575,66.314 ; v1@99.011,68.561 ccw(c99.236,69.052) 99.703,68.782 ; v1@99.011,68.561 ccw(c99.236,69.052) 99.703,68.782 ; v1@99.011,68.561 ccw(c99.236,69.052) 99.703,68.782 ; v1@99.011,68.561 ccw(c99.236,69.052) 99.703,68.782 ; v1@99.011,68.561 ccw(c99.236,69.052) 99.703,68.782 ; v1@99.011,68.561 ccw(c99.236,69.052) 99.703,68.782 ; v1@99.07,66.863 ccw(c99.291,66.703) 99.098,66.51 ; v1@99.07,66.863 ccw(c99.291,66.703) 99.098,66.51 ; v1@99.07,66.863 ccw(c99.291,66.703) 99.098,66.51 ; v1@99.078,67.084 ccw(c99.624,67.418) 99.809,66.806 ; v1@99.078,67.084 ccw(c99.624,67.418) 99.809,66.806 ; v1@99.078,67.084 ccw(c99.624,67.418) 99.809,66.806 ; v1@99.078,67.084 ccw(c99.624,67.418) 99.809,66.806 ; v1@99.078,67.084 ccw(c99.624,67.418) 99.809,66.806 ; v1@99.078,67.084 ccw(c99.624,67.418) 99.809,66.806 ; v1@99.081,66.881 ccw(c99.377,66.712) 99.136,66.472 ; v1@99.081,66.881 ccw(c99.377,66.712) 99.136,66.472 ; v1@99.081,66.881 ccw(c99.377,66.712) 99.136,66.472 ; v1@99.096,69.03 ccw(c98.95,69.74) 99.615,69.451 ; v1@99.096,69.03 ccw(c98.95,69.74) 99.615,69.451 ; v1@99.096,69.03 ccw(c98.95,69.74) 99.615,69.451 ; v1@99.096,69.03 ccw(c98.95,69.74) 99.615,69.451 ; 99.098,66.51 cw(c100.277,65.331) MO.2@100.423,66.992 ; 99.098,66.51 cw(c100.277,65.331) MO.2@100.423,66.992 ; 99.098,66.51 cw(c100.277,65.331) MO.2@100.423,66.992 ; 99.098,66.51 99.136,66.472 ; 99.098,66.51 99.67,67.081 ; v1@99.105,66.945 ccw(c99.765,66.828) v1@99.429,66.248 ; v1@99.105,66.945 ccw(c99.765,66.828) v1@99.429,66.248 ; v1@99.105,66.945 ccw(c99.765,66.828) v1@99.429,66.248 ; v1@99.105,66.945 ccw(c99.765,66.828) v1@99.429,66.248 ; v1@99.105,66.945 ccw(c99.765,66.828) v1@99.429,66.248 ; v1@99.105,66.945 ccw(c99.765,66.828) v1@99.429,66.248 ; v1@99.105,66.951 ccw(c100.281,66.779) v1@99.441,65.938 ; v1@99.106,66.951 ccw(c99.726,66.86) v1@99.283,66.417 ; v1@99.105,66.951 ccw(c100.281,66.779) v1@99.441,65.938 ; v1@99.106,66.951 ccw(c99.726,66.86) v1@99.283,66.417 ; v1@99.106,66.951 ccw(c99.726,66.86) v1@99.283,66.417 ; v1@99.106,66.951 ccw(c99.726,66.86) v1@99.283,66.417 ; v1@99.105,66.951 ccw(c100.281,66.779) v1@99.441,65.938 ; v1@99.106,66.957 ccw(c99.766,66.882) v1@99.297,66.413 ; v1@99.106,66.957 ccw(c99.766,66.882) v1@99.297,66.413 ; v1@99.106,66.957 ccw(c99.766,66.882) v1@99.297,66.413 ; v1@99.106,66.957 ccw(c99.766,66.882) v1@99.297,66.413 ; v1@99.107,68.535 ccw(c99.195,69.437) MO.2@99.835,68.796 ; v1@99.107,68.535 ccw(c99.195,69.437) MO.2@99.835,68.796 ; v1@99.107,68.535 ccw(c99.195,69.437) MO.2@99.835,68.796 ; v1@99.111,69.032 ccw(c98.986,70.005) v1@99.835,69.514 ; v1@99.111,69.032 ccw(c98.986,70.005) v1@99.835,69.514 ; v1@99.111,69.032 ccw(c98.986,70.005) v1@99.835,69.514 ; v1@99.111,69.032 ccw(c98.986,70.005) v1@99.835,69.514 ; v1@99.111,69.032 ccw(c98.986,70.005) v1@99.835,69.514 ; v1@99.111,69.032 ccw(c98.986,70.005) v1@99.835,69.514 ; v1@99.136,69.034 ccw(c99.136,70.253) v1@99.998,69.391 ; v1@99.136,69.034 ccw(c99.136,70.253) v1@99.998,69.391 ; v1@99.136,69.034 ccw(c99.136,69.56) 99.508,69.188 ; v1@99.136,69.034 ccw(c99.136,69.504) 99.468,69.172 ; v1@99.136,69.034 ccw(c99.136,70.253) v1@99.998,69.391 ; v1@99.136,69.034 ccw(c99.136,69.56) 99.508,69.188 ; v1@99.136,69.034 ccw(c99.136,69.504) 99.468,69.172 ; v1@99.136,69.034 ccw(c99.136,69.56) 99.508,69.188 ; v1@99.136,69.034 ccw(c99.136,69.504) 99.468,69.172 ; v1@99.136,69.034 ccw(c99.136,69.56) 99.508,69.188 ; v1@99.136,69.034 ccw(c99.136,69.504) 99.468,69.172 ; v1@99.156,69.033 ccw(c99.328,70.802) 100.584,69.545 ; v1@99.156,69.033 ccw(c99.328,70.802) 100.584,69.545 ; v1@99.156,69.033 ccw(c99.328,70.802) 100.584,69.545 ; v1@99.181,69.159 cw(c100,68.34) v1@100,69.498 ; v1@99.181,69.159 cw(c100,68.34) v1@100,69.498 ; v1@99.181,69.159 cw(c100,68.34) v1@100,69.498 ; v1@99.299,68.718 cw(c100.228,68.053) 100.041,69.18 ; v1@99.299,68.718 cw(c100.228,68.053) 100.041,69.18 ; v1@99.299,68.718 cw(c100.228,68.053) 100.041,69.18 ; v1@99.301,69.004 cw(c100.178,68.498) v1@100.029,69.5 ; v1@99.301,69.004 cw(c100.178,68.498) v1@100.029,69.5 ; v1@99.301,69.004 cw(c100.178,68.498) v1@100.029,69.5 ; v1@99.319,68.999 ccw(c98.829,69.848) v1@99.801,69.723 ; v1@99.319,68.999 ccw(c98.829,69.848) v1@99.801,69.723 ; v1@99.319,68.999 ccw(c98.829,69.848) v1@99.801,69.723 ; v1@99.334,68.805 cw(c100.336,68.656) v1@99.829,69.533 ; v1@99.334,68.805 cw(c100.336,68.656) v1@99.829,69.533 ; v1@99.334,68.805 cw(c100.336,68.656) v1@99.829,69.533 ; v1@99.334,68.805 cw(c100.336,68.656) v1@99.829,69.533 ; v1@99.334,68.805 cw(c100.336,68.656) v1@99.829,69.533 ; v1@99.334,68.805 cw(c100.336,68.656) v1@99.829,69.533 ; v1@99.336,68.834 cw(c100.494,68.834) v1@99.675,69.652 ; v1@99.336,68.834 cw(c99.776,68.834) 99.465,69.145 ; v1@99.336,68.834 cw(c99.832,68.834) 99.482,69.185 ; v1@99.336,68.834 cw(c100.494,68.834) v1@99.675,69.652 ; v1@99.336,68.834 cw(c99.776,68.834) 99.465,69.145 ; v1@99.336,68.834 cw(c99.832,68.834) 99.482,69.185 ; v1@99.336,68.834 cw(c99.776,68.834) 99.465,69.145 ; v1@99.336,68.834 cw(c99.832,68.834) 99.482,69.185 ; v1@99.336,68.834 cw(c99.776,68.834) 99.465,69.145 ; v1@99.336,68.834 cw(c99.832,68.834) 99.482,69.185 ; v1@99.336,68.834 cw(c100.494,68.834) v1@99.675,69.652 ; 99.359,66.791 ccw(c99.304,68.471) MO.2@100.531,67.322 ; 99.359,66.791 ccw(c99.304,68.471) MO.2@100.531,67.322 ; 99.359,66.791 ccw(c99.304,68.471) MO.2@100.531,67.322 ; 99.359,66.791 ccw(c99.304,68.471) MO.2@100.531,67.322 ; v1@99.401,66.258 ccw(c98.753,66.906) 99.67,66.906 ; v1@99.401,66.258 ccw(c98.753,66.906) 99.67,66.906 ; v1@99.401,66.258 ccw(c98.753,66.906) 99.67,66.906 ; v1@99.441,65.938 99.949,65.43 100.051,65.43 ; v1@99.441,65.938 99.441,66.243 99.657,66.027 99.67,66.04 99.67,67.081 ; v1@99.443,66.289 ccw(c99.155,66.788) 99.711,66.639 ; v1@99.443,66.289 ccw(c99.155,66.788) 99.711,66.639 ; v1@99.443,66.289 ccw(c99.155,66.788) 99.711,66.639 ; v1@99.443,66.289 ccw(c99.155,66.788) 99.711,66.639 ; v1@99.443,66.289 ccw(c99.155,66.788) 99.711,66.639 ; v1@99.443,66.289 ccw(c99.155,66.788) 99.711,66.639 ; v1@99.443,68.836 ccw(c98.581,69.698) v1@99.8,69.698 ; v1@99.443,68.836 ccw(c98.581,69.698) v1@99.8,69.698 ; v1@99.443,68.836 ccw(c98.581,69.698) v1@99.8,69.698 ; v1@99.543,66.316 ccw(c99.543,67.106) 100.101,66.547 ; v1@99.543,66.316 ccw(c99.543,67.106) 100.101,66.547 ; v1@99.543,66.316 ccw(c99.543,67.106) 100.101,66.547 ; 99.543,68.504 ccw(c98.761,69.286) v1@99.81,69.635 ; 99.543,68.504 ccw(c98.761,69.286) v1@99.81,69.635 ; 99.543,68.504 ccw(c98.761,69.286) v1@99.81,69.635 ; 99.543,68.504 99.187,68.504 99.187,68.58 100.736,70.129 ; 99.543,68.504 100.584,69.545 ; v1@99.558,66.316 ccw(c99.607,66.94) 100.051,66.497 ; v1@99.558,66.316 ccw(c99.607,66.94) 100.051,66.497 ; v1@99.558,66.316 ccw(c99.607,66.94) 100.051,66.497 ; 99.646,69.325 ccw(c99.274,69.698) v1@99.8,69.698 ; 99.646,69.325 ccw(c99.274,69.698) v1@99.8,69.698 ; 99.646,69.325 ccw(c99.274,69.698) v1@99.8,69.698 ; 99.646,69.325 ccw(c99.274,69.698) v1@99.8,69.698 ; 99.649,69.352 cw(c100,69.001) v1@100,69.498 ; 99.649,69.352 cw(c100,69.001) v1@100,69.498 ; 99.649,69.352 cw(c100,69.001) v1@100,69.498 ; 99.649,69.352 cw(c100,69.001) v1@100,69.498 ; 99.662,69.366 ccw(c99.33,69.698) v1@99.8,69.698 ; 99.662,69.366 ccw(c99.33,69.698) v1@99.8,69.698 ; 99.662,69.366 ccw(c99.33,69.698) v1@99.8,69.698 ; 99.662,69.366 ccw(c99.33,69.698) v1@99.8,69.698 ; v1@99.67,66.485 cw(c100.71,66.485) MO.2@100.431,67.487 ; v1@99.67,66.485 cw(c100.71,66.485) MO.2@100.431,67.487 ; v1@99.67,66.485 cw(c100.71,66.485) MO.2@100.431,67.487 ; 99.67,67.081 cw(c99.936,66.815) MO.2@100.189,67.094 ; 99.67,67.081 cw(c99.936,66.815) MO.2@100.189,67.094 ; 99.67,67.081 cw(c99.936,66.815) MO.2@100.189,67.094 ; 99.67,67.143 cw(c100.527,67.143) MO.2@100.297,67.968 ; 99.67,67.143 cw(c100.527,67.143) MO.2@100.297,67.968 ; 99.67,67.143 cw(c100.527,67.143) MO.2@100.297,67.968 ; 99.689,69.369 cw(c100,69.058) v1@100,69.498 ; 99.689,69.369 cw(c100,69.058) v1@100,69.498 ; 99.689,69.369 cw(c100,69.058) v1@100,69.498 ; 99.689,69.369 cw(c100,69.058) v1@100,69.498 ; 99.789,69.194 ccw(c99.601,69.935) v1@100.258,69.544 ; 99.789,69.194 ccw(c99.601,69.935) v1@100.258,69.544 ; 99.789,69.194 ccw(c99.601,69.935) v1@100.258,69.544 ; v1@99.81,69.616 ccw(c101.784,69.614) MO.2@100.387,68.22 ; v1@99.81,69.616 ccw(c101.784,69.614) MO.2@100.387,68.22 ; v1@99.81,69.616 ccw(c101.784,69.614) MO.2@100.387,68.22 ; 99.836,66.575 ccw(c99.548,67.063) MO.2@100.082,67.255 ; 99.836,66.575 ccw(c99.548,67.063) MO.2@100.082,67.255 ; 99.836,66.575 ccw(c99.548,67.063) MO.2@100.082,67.255 ; MO.2@99.844,66.89 ccw(c99.657,67.951) MO.2@100.54,67.333 ; MO.2@99.844,66.89 ccw(c99.657,67.951) MO.2@100.54,67.333 ; MO.2@99.844,66.89 ccw(c99.657,67.951) MO.2@100.54,67.333 ; v1@99.858,69.556 cw(c98.107,67.804) MO.2@100.584,67.804 ; v1@99.858,69.556 cw(c98.107,67.804) MO.2@100.584,67.804 ; v1@99.858,69.556 cw(c98.107,67.804) MO.2@100.584,67.804 ; 99.982,68.972 cw(c100.564,69.127) v1@100.14,69.555 ; 99.982,68.972 cw(c100.564,69.127) v1@100.14,69.555 ; 99.982,68.972 cw(c100.564,69.127) v1@100.14,69.555 ; 99.982,68.972 cw(c100.564,69.127) v1@100.14,69.555 ; v1@100.022,69.499 cw(c100.092,68.888) 100.624,69.195 ; v1@100.022,69.499 cw(c100.092,68.888) 100.624,69.195 ; v1@100.022,69.499 cw(c100.092,68.888) 100.624,69.195 ; v1@100.029,69.895 ccw(c100.15,70.716) 100.736,70.129 ; v1@100.029,69.895 ccw(c100.15,70.716) 100.736,70.129 ; v1@100.029,69.895 ccw(c100.15,70.716) 100.736,70.129 ; 100.051,65.43 100.051,66.497 ; 100.051,66.409 cw(c100.651,66.409) MO.2@100.535,66.998 ; 100.051,66.409 cw(c100.651,66.409) MO.2@100.535,66.998 ; 100.051,66.409 cw(c100.651,66.409) MO.2@100.535,66.998 ; 100.051,66.497 ccw(c99.668,66.879) MO.2@100.122,67.173 ; 100.051,66.497 ccw(c100.726,66.497) v1@100.616,65.831 ; 100.051,66.497 ccw(c99.668,66.879) MO.2@100.122,67.173 ; 100.051,66.497 ccw(c100.726,66.497) v1@100.616,65.831 ; 100.051,66.497 ccw(c99.668,66.879) MO.2@100.122,67.173 ; 100.051,66.497 ccw(c100.726,66.497) v1@100.616,65.831 ; 100.051,66.497 100.127,66.573 ; 100.051,66.648 cw(c101.2,66.648) MO.2@100.387,67.461 ; 100.051,66.648 cw(c101.2,66.648) MO.2@100.387,67.461 ; 100.051,66.648 cw(c101.2,66.648) MO.2@100.387,67.461 ; 100.115,69.076 ccw(c99.62,69.571) v1@100.284,69.792 ; 100.115,69.076 ccw(c99.62,69.571) v1@100.284,69.792 ; 100.115,69.076 ccw(c99.62,69.571) v1@100.284,69.792 ; 100.127,66.573 ccw(c99.833,66.867) MO.2@100.151,67.133 ; 100.127,66.573 cw(c99.44,65.886) v1@100.389,65.677 ; 100.127,66.573 ccw(c99.833,66.867) MO.2@100.151,67.133 ; 100.127,66.573 cw(c99.44,65.886) v1@100.389,65.677 ; 100.127,66.573 ccw(c99.833,66.867) MO.2@100.151,67.133 ; 100.127,66.573 cw(c99.44,65.886) v1@100.389,65.677 ; 100.127,66.573 100.584,66.116 ; MO.2@100.144,68.539 ccw(c99.689,68.9) 100.25,69.05 ; MO.2@100.144,68.539 ccw(c99.689,68.9) 100.25,69.05 ; MO.2@100.144,68.539 ccw(c99.689,68.9) 100.25,69.05 ; MO.2@100.157,67.127 cw(c99.582,66.626) 100.242,66.244 ; MO.2@100.157,67.127 cw(c99.582,66.626) 100.242,66.244 ; MO.2@100.157,67.127 cw(c99.582,66.626) 100.242,66.244 ; MO.2@100.175,67.108 cw(c99.188,66.12) 100.584,66.12 ; MO.2@100.175,67.108 cw(c99.188,66.12) 100.584,66.12 ; MO.2@100.175,67.108 cw(c99.188,66.12) 100.584,66.12 ; MO.2@100.175,68.573 ccw(c98.33,70.419) 100.94,70.419 ; MO.2@100.175,68.573 ccw(c98.33,70.419) 100.94,70.419 ; MO.2@100.175,68.573 ccw(c98.33,70.419) 100.94,70.419 ; MO.2@100.178,68.576 ccw(c99.225,69.545) 100.584,69.545 ; MO.2@100.178,68.576 ccw(c99.225,69.545) 100.584,69.545 ; MO.2@100.178,68.576 ccw(c99.225,69.545) 100.584,69.545 ; v1@100.193,69.646 ccw(c101.296,69.35) MO.2@100.307,68.779 ; v1@100.193,69.646 ccw(c101.296,69.35) MO.2@100.307,68.779 ; v1@100.193,69.646 ccw(c101.296,69.35) MO.2@100.307,68.779 ; v1@100.2,69.698 cw(c101.357,69.698) 100.539,70.516 ; v1@100.2,69.698 cw(c101.357,69.698) 100.539,70.516 ; v1@100.2,69.698 cw(c101.357,69.698) 100.539,70.516 ; v1@100.212,69.91 cw(c99.314,69.011) 100.584,69.011 ; v1@100.212,69.91 cw(c99.314,69.011) 100.584,69.011 ; v1@100.212,69.91 cw(c99.314,69.011) 100.584,69.011 ; 100.25,69.05 ccw(c100.8,69.197) MO.2@100.599,68.665 ; 100.25,69.05 ccw(c100.8,69.197) MO.2@100.599,68.665 ; 100.25,69.05 ccw(c100.8,69.197) MO.2@100.599,68.665 ; v1@100.443,65.775 ccw(c100.101,66.116) 100.584,66.116 ; v1@100.443,65.775 ccw(c100.102,66.116) 100.584,66.116 ; v1@100.443,65.775 ccw(c99.243,66.975) MO.2@100.94,66.975 ; v1@100.443,65.775 ccw(c100.101,66.116) 100.584,66.116 ; v1@100.443,65.775 ccw(c100.102,66.116) 100.584,66.116 ; v1@100.443,65.775 ccw(c99.243,66.975) MO.2@100.94,66.975 ; v1@100.443,65.775 ccw(c100.101,66.116) 100.584,66.116 ; v1@100.443,65.775 ccw(c100.102,66.116) 100.584,66.116 ; v1@100.443,65.775 ccw(c99.243,66.975) MO.2@100.94,66.975 ; MO.2@100.529,68.22 ccw(c99.537,69.212) 100.94,69.212 ; MO.2@100.529,68.22 ccw(c99.537,69.212) 100.94,69.212 ; MO.2@100.529,68.22 ccw(c99.537,69.212) 100.94,69.212 ; MO.2@100.568,66.811 ccw(c101.288,66.391) v1@100.72,65.78 ; MO.2@100.568,66.811 ccw(c101.288,66.391) v1@100.72,65.78 ; MO.2@100.568,66.811 ccw(c101.288,66.391) v1@100.72,65.78 ; MO.2@100.568,66.811 ccw(c101.288,66.391) v1@100.72,65.78 ; MO.2@100.568,66.811 ccw(c101.288,66.391) v1@100.72,65.78 ; MO.2@100.568,66.811 ccw(c101.288,66.391) v1@100.72,65.78 ; 100.584,66.116 ccw(c101.067,66.116) v1@100.725,65.775 ; 100.584,66.116 ccw(c101.066,66.116) v1@100.725,65.775 ; 100.584,66.116 ccw(c101.067,66.116) v1@100.725,65.775 ; 100.584,66.116 ccw(c101.066,66.116) v1@100.725,65.775 ; 100.584,66.116 ccw(c101.067,66.116) v1@100.725,65.775 ; 100.584,66.116 ccw(c101.066,66.116) v1@100.725,65.775 ; 100.584,66.116 100.584,69.545 ; 100.584,66.729 cw(c101.119,66.729) MO.2@100.741,67.108 ; 100.584,66.729 cw(c101.119,66.729) MO.2@100.741,67.108 ; 100.584,66.729 cw(c101.119,66.729) MO.2@100.741,67.108 ; 100.584,68.952 ccw(c101.119,68.952) MO.2@100.741,68.573 ; 100.584,68.952 ccw(c101.119,68.952) MO.2@100.741,68.573 ; 100.584,68.952 ccw(c101.119,68.952) MO.2@100.741,68.573 ; 100.739,69.55 ccw(c101.568,69.071) MO.2@100.785,68.521 ; 100.739,69.55 ccw(c101.568,69.071) MO.2@100.785,68.521 ; 100.739,69.55 ccw(c101.568,69.071) MO.2@100.785,68.521 ; v1@100.77,65.706 cw(c101.561,66.015) 100.826,66.439 ; v1@100.77,65.706 cw(c101.561,66.015) 100.826,66.439 ; v1@100.77,65.706 cw(c101.561,66.015) 100.826,66.439 ; v1@99.67,65.827 cw(c100.892,65.827) 100.565,67.005 ccw(c100.892,65.827) v1@99.67,65.827